# Altium PCB BOARD.PcbDoc
Units mm, origin at the board's own origin, x right, y up, seen from the top; angles counter-clockwise.
Board outline 20 x 22.5 mm, 2 copper layers (Top Layer, Bottom Layer), stack 1.18 mm thick; 4 components, 8 nets, 21 pads, 23 vias.
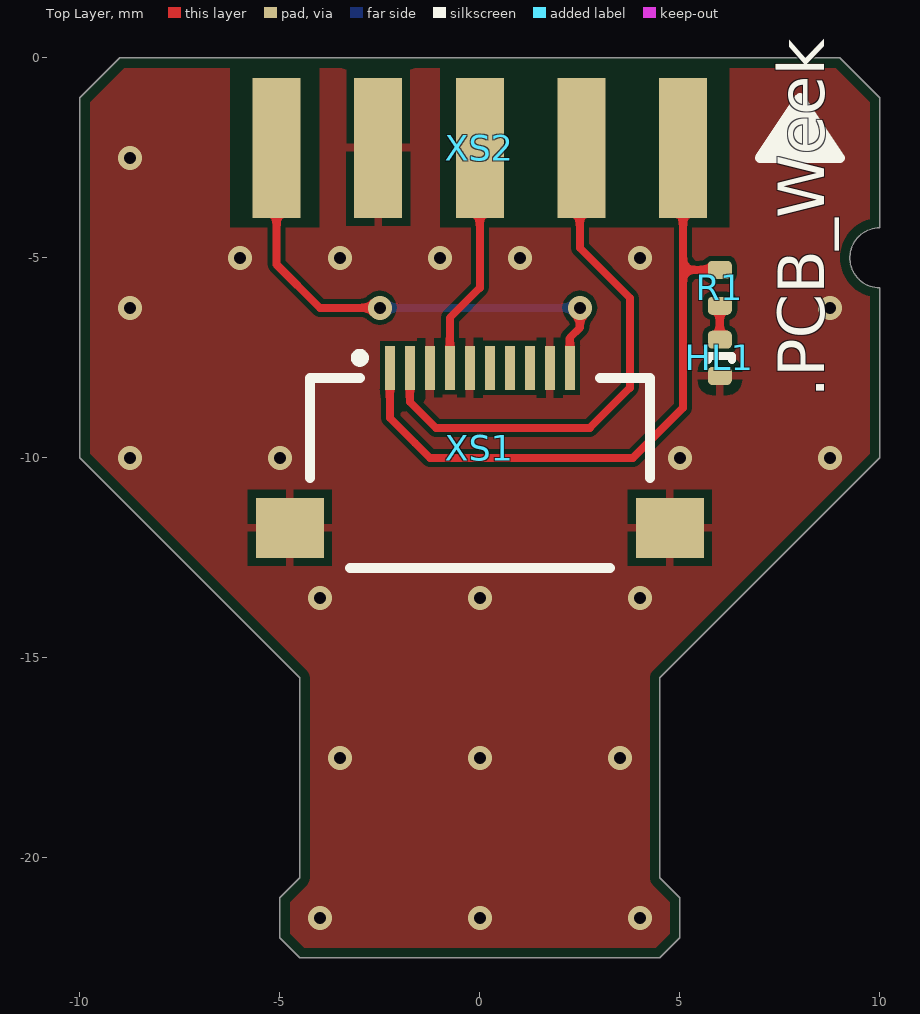
[diagram p0: Top Layer view]
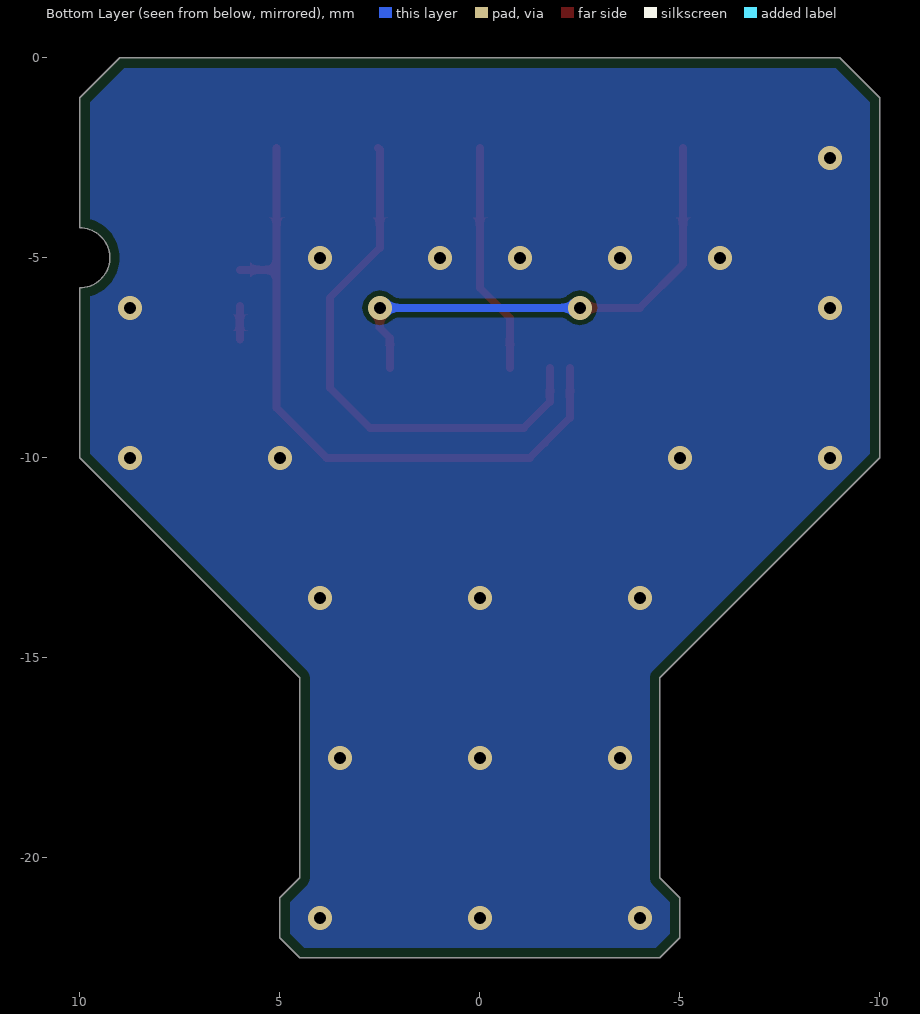
[diagram p1: Bottom Layer view, seen from below]

## Layer stack, top to bottom
Top Solder: solder mask 0.01, Solder Resist, Dk 3.5
Top Layer: signal copper 0.03
Dielectric1: core 1.12, FR-4, Dk 4.2
Bottom Layer: signal copper 0.03
Bottom Solder: solder mask 0.01, Solder Resist, Dk 3.5

## Board outline
-5,-22 -4.5,-22.5 4.5,-22.5 5,-22 5,-21 4.5,-20.5 4.5,-15.5 10,-10 10,-5.75 cw(c10,-5) 10,-4.25 10,-1 9,0 -9,0 -10,-1 -10,-10 -4.5,-15.5 -4.5,-20.5 -5,-21

## Design rules (kind name [scope] priority, off if disabled: settings)
BoardOutlineClearance [All] p1: gap=0.25 ignorepadtopadclearanceinfootprint=FALSE
Clearance [All] p1: gap=0.127 ignorepadtopadclearanceinfootprint=FALSE
ComponentClearance [All] p1 off: gap=0.25 collisioncheckmode=3 verticalgap=0.25 showdistances=FALSE
DiffPairsRouting [All] p1: maxlimit=0.4 minlimit=0.15 mostfreqgap=0.25 toplayer_minwidth=0.2 toplayer_maxwidth=0.4 toplayer_prefwidth=0.25 bottomlayer_minwidth=0.2 bottomlayer_maxwidth=0.4 bottomlayer_prefwidth=0.25 maxuncoupledlength=12
Height [All] p1: minheight=0 maxheight=25 prefheight=25
HoleSize [All] p1: absolutevalues=TRUE maxlimit=6 minlimit=0.3 maxpercent=80.000 minpercent=20.000
HoleToHoleClearance [All] p1: gap=0.25 allowstackedmicrovias=TRUE
MinimumSolderMaskSliver [All] p1 off: minsoldermaskwidth=0.254
PlaneClearance [All] p1: clearance=0.5
PlaneConnect [All] p1: planeconnectstyle=Relief reliefexpansion=0.5 reliefentries=4 reliefconductorwidth=0.25 reliefairgap=0.25
PolygonConnect PolygonConnect_DirectConnect [InComponentClass('DirectConnect')] p1: connectstyle=Direct reliefconductorwidth=0.254 reliefentries=4 polygonreliefangle="90 Angle" airgapwidth=0.254
PolygonConnect PolygonConnect_Components [InComponent('C*') OR InComponent('R*') OR InComponent('NR*') OR InComponent('DA*') OR InComponent('DD*') OR InComponent('HL*')] p2: connectstyle=Relief reliefconductorwidth=0.2 reliefentries=4 polygonreliefangle="90 Angle" airgapwidth=0.25
PolygonConnect PolygonConnect_Connectors [All vs (InPadClass('All Pads'))] p3: connectstyle=Relief reliefconductorwidth=0.2 reliefentries=4 polygonreliefangle="90 Angle" airgapwidth=0.2
PolygonConnect PolygonConnect_Via [All] p4: connectstyle=Direct reliefconductorwidth=0.254 reliefentries=4 polygonreliefangle="90 Angle" airgapwidth=0.254
RoutingCorners [All] p1: cornerstyle=45-Degree minsetback=1.5 maxsetback=3.5
RoutingVias [All] p1: holewidth=0.6 width=1.2 viastyle="Through Hole" minholewidth=0.3 minwidth=0.6 maxholewidth=1 maxwidth=2
SMDEntry [All] p1: side=TRUE corner=TRUE anyangle=TRUE
SilkToSilkClearance [All] p1 off: silktosilkclearance=0.254
SilkToSolderMaskClearance [IsPad] p1 off: minsilkscreentomaskgap=0.254 clearancetoexposedcopper=TRUE
SolderMaskExpansion [All] p1: expansion=0.05
Width [All] p1: maxlimit=8 minlimit=0.15 preferedwidth=0.6
Width Width_TrackEnds [All] p2 off: maxlimit=0.25 minlimit=0.25 preferedwidth=0.25 checkconnectedcopper=TRUE
19 further rules are at their usual default settings.

## Components (designator, comment, footprint, x,y, rotation, side; value= is the part's Value field where it differs from the comment)
HL1 "TVCC" LD0402_L 6,-7.5 r270 top value=KPHHS-1005QBC-D-V
R1 "Resistor" R0402_L 6,-5.75 r90 top value=10k
XS1 "JTAG" XF2M-1015-1A 0,-10 r180 top locked value=XF2M-1015-1A
XS2 "SWD" PBS-5 0,0 r0 top locked value=PBS-5

## Footprints (in the part's own frame and the unit in brackets; to place one, negate y for a bottom-side part, rotate by r counter-clockwise, add the part's x,y. Pads: shape width x height; smd on the part's side, far side on the other; paste and mask are expansions set on the pad)
LD0402_L [mm] "Chip Led; Body 1.0 x 0.5 mm (LxW typ)"
  rrect50% 0.45x0.6 smd mask+0.05: 1(-0.452,0) 2(0.452,0)
  silkscreen extent -0.05,-0.3 0.05,0.3, body extent -0.5,-0.3 0.5,0.3, height 0.2
PBS-5 [mm]
  rect 1.2x3.5 smd: 1(5.08,-2.25) 2(2.54,-2.25) 3(0,-2.25) 4(-2.54,-2.25) 5(-5.08,-2.25)
  body extent -6.35,-3.5 6.35,8.15, height 1.62
R0402_L [mm] "Chip Resistor; Body 1.0 x 0.5 mm (LxW typ)"
  rrect50% 0.45x0.6 smd: 1(-0.45,0) 2(0.45,0)
  body extent -0.5,-0.26 0.5,0.26, height 0.36
XF2M-1015-1A [mm]
  rect 0.25x1.1 smd mask+0.025: 1(2.25,-2.25) 2(1.75,-2.25) 3(1.25,-2.25) 4(0.75,-2.25) 5(0.25,-2.25) 6(-0.25,-2.25) 7(-0.75,-2.25) 8(-1.25,-2.25) 9(-1.75,-2.25) 10(-2.25,-2.25)
  rect 1.7x1.5 smd mask+0.025: SH(-4.75,1.75) SH(4.75,1.75)
  silkscreen extent -4.25,-2.6 4.25,2.75, body extent -4.55,-3.2 4.55,2.7, height 2

## Part data
HL1: library part KPHHS-1005QBC-D-V, Color=Blue, Forward Current=20mA, Forward Voltage=3.3V, Manufacturer=Kingbright, Power Dissipation=120mW, Working Temperature Max=+85°С, Working Temperature Min=-40°С, Application Category=1, ID=24, Leds=1, Luminous Flux=60, Part Number=KPHHS-1005QBC-D-V, Published=03.12.2013, Publisher="Andrew Danich", Type="Индикатор единичный"
R1: library part RC0402JR-0710KL, Limit Voltage=50V, Manufacturer=Yageo, Temperature Coefficient=100ppm, Tolerance=±5%, Total Power Dissipation=0.1W, Working Temperature Max=+155°С, Working Temperature Min=-55°С, Application Category=1, ID=476, Part Number=RC0402JR-0710KL, Published=24.03.2010, Publisher="Andrew Danich", Series Type=Thick-Film, Type=Резистор
XS1: library part XF2M-1015-1A, Limit Current=500mA, Limit Voltage=50V, Manufacturer="Omron Electronics", Resistance=0.05ohm, Working Temperature Max=+85°С, Working Temperature Min=-30°С, Application Category=1, Connector Type=Female, ID=7, Part Number=XF2M-1015-1A, Pins=10, Pitch=0.5mm, Published=07.09.2015, Publisher="Viktor Klishin", Series=FPC, Type=Розетка
XS2: library part PBS-5_S, Published=07.09.2015, Publisher="Andrew Danich", Type=Розетка

## Via types
v1: diameter 0.6, hole 0.3, Top Layer to Bottom Layer, tented both sides, 23 vias

## Nets (pads, with @x,y where several pads share a name; then routed paths per layer and width w, separated by ;. In a path a pad name is that pad's centre, name@x,y a point inside that pad or via, vN(x,y) a via of type N, cw(c..) or ccw(c..) an arc to the next point about the centre after c; other vN are vias at no path point)
GND: HL1.2 XS1.3 XS1.5 XS1.9 XS1.SH XS2.4
  other v1: -4,-21.5 0,-21.5 4,-21.5 -3.5,-17.5 0,-17.5 3.5,-17.5 -4,-13.5 0,-13.5 4,-13.5 -8.75,-10 -5,-10 5,-10 8.75,-10 -8.75,-6.25 8.75,-6.25 -6,-5 -3.5,-5 -1,-5 1,-5 4,-5 -8.75,-2.5
JTAG_RST_N: XS1.10 XS2.5 | length 12.6
  Top Layer w0.2: XS2.5 -5.08,-5.17 -4,-6.25 v1(-2.5,-6.25) ; XS1.10 2.25,-7 2.502,-6.748 v1@2.502,-6.25
  Bottom Layer w0.2: v1(-2.5,-6.25) v1(2.5,-6.25)
JTAG_TCK: XS1.4 XS2.3 | length 5.8
  Top Layer w0.2: XS1.4 -0.75,-6.5 0,-5.75 XS2.3
JTAG_TDI: XS1.8
JTAG_TDO: XS1.6
JTAG_TMS: XS1.2 XS2.2 | length 13.6
  Top Layer w0.2: XS1.2 -1.75,-8.6 -1.1,-9.25 2.75,-9.25 3.75,-8.25 3.75,-6 2.5,-4.75 2.5,-2.29 XS2.2
NetHL1_1: HL1.1 R1.1 | length 0.8
  Top Layer w0.2: HL1.1 R1.1
TVCC: R1.2 XS1.1 XS2.1 | length 16.9
  Top Layer w0.2: XS1.1 -2.25,-9 -1.625,-9.625 -1.25,-10 3.83,-10 5.08,-8.75 5.08,-5.3 ; XS2.1 5.08,-5.3 ; R1.2 5.08,-5.3
pads on no net: XS1.7

## Polygon pours and split planes (outlines as drawn)
no net on Bottom Solder "GND_L02_P-001" (solid, remove dead copper): 13.25,12.75
GND on Top Layer "GND_L01_P002" (solid, remove dead copper, pour order 2): -10,-22.5 10,-22.5 10,0 -10,0
GND on Bottom Layer "GND_L02_P004" (solid, remove dead copper, pour order 4): -10,-22.5 10,-22.5 10,0 -10,0

## Other copper
Top Layer:
  pour cut-out: -1,0 6.25,0 6.25,-4.25 -1,-4.25
  pour cut-out: -6.25,0 -4,0 -4,-4.25 -6.25,-4.25

## Silkscreen, mask and mechanical layers (free items; w line width, h text height)
Top Overlay:
  region: 8,-1 7,-2.5 9,-2.5
  lines w0.25: 7,-2.5 8,-1 9,-2.5 7,-2.5
  text ".PCB_Week" at 9,-8.5 h2 r90
1 - Board Outline:
  the board outline again, w0.25